# Altium PCB Hospital Negatoscope Touch PCB v1.PcbDoc
Units mm, origin at the board's own origin, x right, y up, seen from the top; angles counter-clockwise.
Board outline 262.91 x 32.79 mm, 2 copper layers (Top Layer, Bottom Layer); 32 components, 41 nets, 94 pads, 22 vias.
Unrouted connection lines stored in the file: 104.
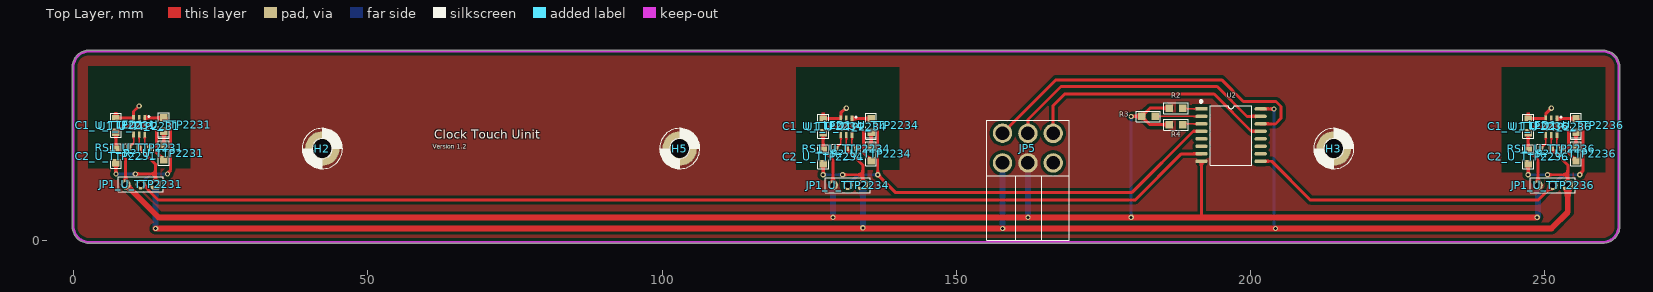
[diagram p0: Top Layer view]
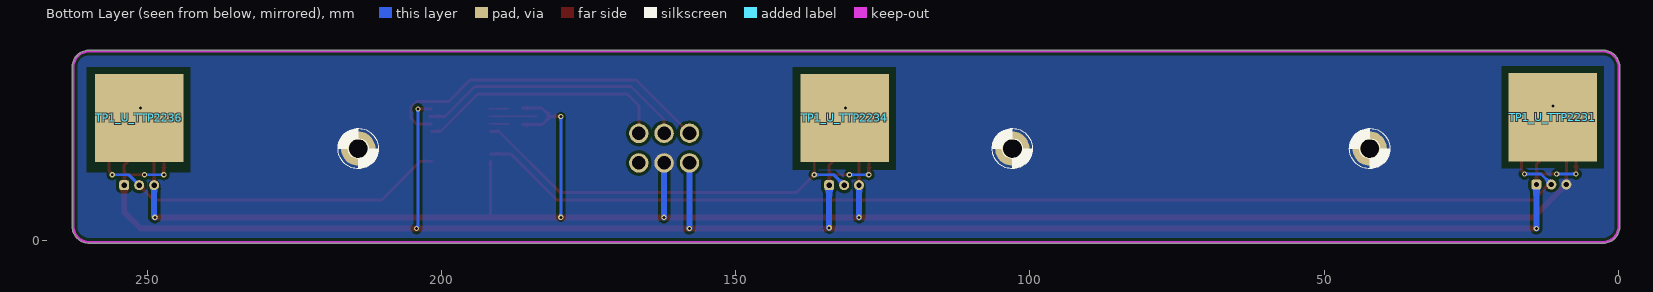
[diagram p1: Bottom Layer view, seen from below]

## Layer stack, top to bottom
Top Solder: solder mask 0.0102, Solder Resist, Dk 3.5
Top Layer: signal copper 0.0356
Dielectric 1: dielectric 0.32, FR-4, Dk 4.8
Bottom Layer: signal copper 0.0356
Bottom Solder: solder mask 0.0102, Solder Resist, Dk 3.5

## Board outline
2.495,-0.449 cw(c2.667,2.413) -0.195,2.241 -0.2,2.286 -0.2,29.591 -0.195,29.636 cw(c2.667,29.464) 2.664,32.331 2.667,32.331 186.944,32.331 259.969,32.331 260.014,32.326 cw(c259.842,29.464) 262.704,29.636 262.709,29.591 262.709,2.159 262.689,2.071 cw(c259.842,2.413) 259.842,-0.454 259.841,-0.454 2.67,-0.454

## Design rules (kind name [scope] priority, off if disabled: settings)
Clearance Clearance_2 [InNamedPolygon('GND_L01_P002') Or InNamedPolygon('GND_L02_P003')] p1: gap=0.5 ignorepadtopadclearanceinfootprint=FALSE
Clearance [All] p2: gap=0.254 ignorepadtopadclearanceinfootprint=FALSE
ComponentClearance [All] p1: gap=0 collisioncheckmode=3 verticalgap=0 showdistances=FALSE
HoleSize [All] p1: absolutevalues=TRUE maxlimit=5 minlimit=0.025 maxpercent=80.000 minpercent=20.000
PlaneConnect [All] p1: planeconnectstyle=Direct reliefexpansion=0.508 reliefentries=4 reliefconductorwidth=0.254 reliefairgap=0.254
PolygonConnect PolygonConnect_2 [All vs IsNamedPolygon('GND_L01_P002') Or IsNamedPolygon('GND_L02_P003')] p1: connectstyle=Direct reliefconductorwidth=0.254 reliefentries=4 polygonreliefangle="90 Angle" airgapwidth=0.254
RoomDefinition U_TTP2234 [InComponentClass('U_TTP2234')] p1 off: confinementstyle=ConfineIn formatcopy=TRUE lockcomponents=FALSE outline 125.857,11.938 137.16,11.938 137.16,27.051 125.857,27.051
RoutingVias [All] p1: holewidth=0.5 width=0.9 viastyle="Through Hole" minholewidth=0.5 minwidth=0.9 maxholewidth=0.5 maxwidth=0.9
SolderMaskExpansion [All] p1: expansion=0.102 istentingtop=FALSE
Width [All] p1: maxlimit=1 minlimit=0.254 preferedwidth=0.5
27 further rules are at their usual default settings.

## Classes and differential pairs
channel class TTP223: U_TTP2231 U_TTP2232 U_TTP2233 U_TTP2234 U_TTP2235 U_TTP2236
component class U_TTP2236: C1_U_TTP2236 C2_U_TTP2236 JP1_U_TTP2236 LED1_U_TTP2236 R?_U_TTP2236 RS1_U_TTP2236 TP1_U_TTP2236 U1_U_TTP2236
component class U_TTP2234: C1_U_TTP2234 C2_U_TTP2234 JP1_U_TTP2234 LED1_U_TTP2234 R?_U_TTP2234 RS1_U_TTP2234 TP1_U_TTP2234 U1_U_TTP2234
component class U_TTP2231: C1_U_TTP2231 C2_U_TTP2231 JP1_U_TTP2231 LED1_U_TTP2231 R?_U_TTP2231 RS1_U_TTP2231 TP1_U_TTP2231 U1_U_TTP2231
component class U_PCF8574: R2 R3 R4 U2
component class Main: H2 H3 H5

## Components (designator, comment, footprint, x,y, rotation, side; value= is the part's Value field where it differs from the comment)
C1_U_TTP2231 "100nF" "C 0805" 7.233,19.558 r270 top (schematic designator C1)
C1_U_TTP2234 "100nF" "C 0805" 127.381,19.431 r270 top (schematic designator C1)
C1_U_TTP2236 "100nF" "C 0805" 247.142,19.431 r270 top (schematic designator C1)
C2_U_TTP2231 "30pF" "C 0805" 7.233,14.351 r90 top (schematic designator C2)
C2_U_TTP2234 "30pF" "C 0805" 127.381,14.224 r90 top (schematic designator C2)
C2_U_TTP2236 "30pF" "C 0805" 247.142,14.224 r90 top (schematic designator C2)
H2 "Round Pad" P3.2C 42.291,15.621 r0 top
H3 "Round Pad" P3.2C 214.122,15.621 r0 top
H5 "Round Pad" P3.2C 102.997,15.621 r0 top
JP1_U_TTP2231 "HDR-1X3" HDR-1X3_M 13.964,9.525 r180 top (schematic designator JP1)
JP1_U_TTP2234 "HDR-1X3" HDR-1X3_M 134.112,9.398 r180 top (schematic designator JP1)
JP1_U_TTP2236 "HDR-1X3" HDR-1X3_M 253.873,9.398 r180 top (schematic designator JP1)
JP5 "Header3X2" ATX-3*2-Right 155.139,-0.012 r0 top
LED1_U_TTP2231 "LED-SMD" "LED 0805G" 15.361,19.685 r270 top (schematic designator LED1)
LED1_U_TTP2234 "LED-SMD" "LED 0805G" 135.509,19.558 r270 top (schematic designator LED1)
LED1_U_TTP2236 "LED-SMD" "LED 0805G" 255.27,19.558 r270 top (schematic designator LED1)
R2 "10K" "R 0805" 187.325,22.479 r0 top
R3 "10K" "R 0805" 182.626,21.082 r0 top
R4 "10K" "R 0805" 187.325,19.685 r0 top
R?_U_TTP2231 "Value" "R 0805" 15.361,14.859 r270 top (schematic designator R?)
R?_U_TTP2234 "Value" "R 0805" 135.509,14.732 r270 top (schematic designator R?)
R?_U_TTP2236 "Value" "R 0805" 255.27,14.732 r270 top (schematic designator R?)
RS1_U_TTP2231 "Resistor Selector" "RS 0603" 12.033,15.748 r180 top (schematic designator RS1)
RS1_U_TTP2234 "Resistor Selector" "RS 0603" 132.182,15.621 r180 top (schematic designator RS1)
RS1_U_TTP2236 "Resistor Selector" "RS 0603" 251.943,15.621 r180 top (schematic designator RS1)
TP1_U_TTP2231 "TouchKey" "Square TouchKey (1.5cm)" 11.176,20.955 r90 top (schematic designator TP1)
TP1_U_TTP2234 "TouchKey" "Square TouchKey (1.5cm)" 131.445,20.828 r90 top (schematic designator TP1)
TP1_U_TTP2236 "TouchKey" "Square TouchKey (1.5cm)" 251.333,20.828 r90 top (schematic designator TP1)
U1_U_TTP2231 "TTP223" SOT23-6L 11.17,19.431 r180 top (schematic designator U1)
U1_U_TTP2234 "TTP223" SOT23-6L 131.318,19.304 r180 top (schematic designator U1)
U1_U_TTP2236 "TTP223" SOT23-6L 251.079,19.304 r180 top (schematic designator U1)
U2 "PCF8574" SOP16W_M 196.668,17.907 r0 top

## Footprints (in the part's own frame and the unit in brackets; to place one, negate y for a bottom-side part, rotate by r counter-clockwise, add the part's x,y. Pads: shape width x height; smd on the part's side, far side on the other; paste and mask are expansions set on the pad)
ATX-3*2-Right [mm]
  round 3.3 hole 2.3: 1(2.705,18.245) 2(7.015,18.23) 3(11.315,18.215) 4(2.705,13.195) 5(7.015,13.195) 6(11.315,13.195)
  silkscreen extent -0.01,0.08 14.03,20.41
"C 0805" [mil] "ï¿½Þ¼ï¿½ï¿½ï¿½ï¿½ï¿½Æ¬ï¿½ï¿½ï¿½ï¿½"
  rect 50x50 smd: 1(-45,0) 2(45,0)
  silkscreen extent -81,-36 81,36, body extent -39,-24 39,24, height 20
HDR-1X3_M [mm] "ï¿½ï¿½Ä¸ï¿½ï¿½3ï¿½ï¿½"
  rrect50% 1.7x1.7 hole 0.9: 1(0,0)
  round 1.7 hole 0.9: 2(2.54,0) 3(5.08,0)
  silkscreen extent -1.27,-1.27 6.35,1.27, body extent -1.27,-1.27 6.35,1.27, height 8.5
"LED 0805G" [mil] "ï¿½ï¿½É«0805LED"
  rect 50x50 smd: 1(-45,0) 2(45,0)
  silkscreen extent -81,-36 92,36, body extent -39,-25 39,25, height 32
P3.2C [mil] "MOUNTING PAD 3.2 mm, round, 5.8 mm Diameter"
  round 230 hole 125.98: P(0,0)
  silkscreen extent -135,-135 135,135
"R 0805" [mm] "1/8Wï¿½ï¿½Æ¬ï¿½ï¿½ï¿½ï¿½"
  rect 1.27x1.27 smd: 1(-1.143,0) 2(1.143,0)
  silkscreen extent -2.05,-0.91 2.05,0.91, body extent -1,-0.62 1,0.63, height 0.5
"RS 0603" [mil]
  rect 35x35 smd: 1(-35,0) 2(104,0) 3(34,0)
  silkscreen extent -63,-28 132,28, body extent -31,-16 32,16, height 16
SOP16W_M [mm] "10.3*10.3*2.6mm£¨³¤¿í¸ß£©"
  rect 2.1x0.6 smd: 1(-5.025,4.445)
  oval 2.1x0.6 smd: 2(-5.025,3.175) 3(-5.025,1.905) 4(-5.025,0.635) 5(-5.025,-0.635) 6(-5.025,-1.905) 7(-5.025,-3.175) 8(-5.025,-4.445) 9(5.025,-4.445) 10(5.025,-3.175) 11(5.025,-1.905) 12(5.025,-0.635) 13(5.025,0.635) 14(5.025,1.905) 15(5.025,3.175) 16(5.025,4.445)
  silkscreen extent -5.23,-5.08 3.56,5.87, body extent -5.15,-5.15 5.15,5.15, height 2.7
SOT23-6L [mm] "3x1.6x1.1mm(ï¿½ï¿½ï¿½ï¿½ï¿½)"
  rect 0.45x1 smd: 1(-0.95,-1.397) 2(0,-1.397) 3(0.95,-1.397) 4(0.95,1.397) 5(0,1.397) 6(-0.95,1.397)
  silkscreen extent -1.78,-1.78 1.55,0.51, body extent -1.5,-1.4 1.5,1.4, height 1.15
"Square TouchKey (1.5cm)" [mm]
  rect 15x15 smd far side: 1(0,0)

## Part data
C1_U_TTP2231 C1_U_TTP2234 C1_U_TTP2236 C2_U_TTP2231 C2_U_TTP2234 C2_U_TTP2236: library part C, "Non-polar patch capacitor", BOM名称=无极性贴片电容, 学习资源=www.ooocke.com, 版权归属=源创客
H2 H3 H5: library part MOUNT-PAD-ROUND, "MOUNTING PAD, round"
JP1_U_TTP2231 JP1_U_TTP2234 JP1_U_TTP2236: library part "Header 3", "3P Connector", BOM名称=3P接插件, 学习资源=www.ooocke.com, 版权归属=源创客
JP5: library part "Header 3X2", "3*2P Connector", BOM名称=3*2P接插件, 学习资源=www.ooocke.com, 版权归属=源创客
LED1_U_TTP2231 LED1_U_TTP2234 LED1_U_TTP2236: "Patch LED", BOM名称=贴片LED, 学习资源=www.ooocke.com, 版权归属=源创客
R2 R3 R4 R?_U_TTP2231 R?_U_TTP2234 R?_U_TTP2236: library part R, "Chip resistor", BOM名称="Chip resistor", 学习资源=www.ooocke.com, 版权归属=源创客
U2: "Remote 8-Bit I/O Expander for I  2C Bus"

## Via types
v1: diameter 0.9, hole 0.5, Top Layer to Bottom Layer, tented both sides, 22 vias

## Nets (pads, with @x,y where several pads share a name; then routed paths per layer and width w, separated by ;. In a path a pad name is that pad's centre, name@x,y a point inside that pad or via, vN(x,y) a via of type N, cw(c..) or ccw(c..) an arc to the next point about the centre after c; other vN are vias at no path point)
3.3V: C2_U_TTP2231.1 C2_U_TTP2234.1 C2_U_TTP2236.1 JP1_U_TTP2231.1 JP1_U_TTP2234.1 JP1_U_TTP2236.1 JP5.4 RS1_U_TTP2231.3 RS1_U_TTP2234.3 RS1_U_TTP2236.3 U1_U_TTP2231.5 U1_U_TTP2234.5 U1_U_TTP2236.5 U2.16 | length 349.5
  Top Layer w0.254: RS1_U_TTP2231.3 U1_U_TTP2231.5 ; RS1_U_TTP2234.3 U1_U_TTP2234.5 ; RS1_U_TTP2236.3 U1_U_TTP2236.5
  Top Layer w0.5: v1(7.233,11.303) C2_U_TTP2231.1 ; v1(10.535,11.303) 13.964,11.303 ; RS1_U_TTP2231.3 13.964,12.954 13.964,11.303 ; JP1_U_TTP2231.1 13.964,11.303 ; v1(127.381,11.176) C2_U_TTP2234.1 ; v1(130.683,11.176) 134.112,11.176 ; RS1_U_TTP2234.3 134.112,12.827 134.112,11.176 ; JP1_U_TTP2234.1 134.112,11.176 ; U2.16 v1(203.962,22.352) ; v1(247.142,11.176) C2_U_TTP2236.1 ; v1(250.444,11.176) 253.873,11.176 ; RS1_U_TTP2236.3 253.873,12.827 253.873,11.176 ; JP1_U_TTP2236.1 253.873,11.176
  Top Layer w1: v1(13.97,2.032) 133.985,2.032 v1(134.112,2.159) 134.239,2.032 v1(157.861,2.032) v1(204.216,2.032) 251.079,2.032 253.873,4.826 JP1_U_TTP2236.1@253.873,9.704
  Bottom Layer w0.5: v1(7.233,11.303) v1(10.535,11.303) ; v1(127.381,11.176) v1(130.683,11.176) ; v1(203.962,22.352) 203.962,2.394 204.216,2.14 v1(204.216,2.032) ; v1(247.142,11.176) v1(250.444,11.176)
  Bottom Layer w1: JP1_U_TTP2231.1 13.964,2.038 v1(13.97,2.032) ; v1(134.112,2.159) JP1_U_TTP2234.1 ; JP5.4 157.844,2.049 v1(157.861,2.032)
AHLB_U_TTP2231: RS1_U_TTP2231.2 U1_U_TTP2231.4 | length 2.6
  Top Layer w0.254: RS1_U_TTP2231.2 10.22,16.576 U1_U_TTP2231.4
AHLB_U_TTP2232: 
AHLB_U_TTP2233: 
AHLB_U_TTP2234: RS1_U_TTP2234.2 U1_U_TTP2234.4 | length 2.6
  Top Layer w0.254: RS1_U_TTP2234.2 130.368,16.449 U1_U_TTP2234.4
AHLB_U_TTP2235: 
AHLB_U_TTP2236: RS1_U_TTP2236.2 U1_U_TTP2236.4 | length 2.6
  Top Layer w0.254: RS1_U_TTP2236.2 250.129,16.449 U1_U_TTP2236.4
GND: C1_U_TTP2231.2 C1_U_TTP2234.2 C1_U_TTP2236.2 C2_U_TTP2231.2 C2_U_TTP2234.2 C2_U_TTP2236.2 H2.P H3.P H5.P JP1_U_TTP2231.3 JP1_U_TTP2234.3 JP1_U_TTP2236.3 JP5.5 R2.1 R3.1 R4.1 R?_U_TTP2231.2 R?_U_TTP2234.2 R?_U_TTP2236.2 U1_U_TTP2231.2 U1_U_TTP2234.2 U1_U_TTP2236.2 U2.8 | length 373.3
  Top Layer w0.254: 11.17,19.431 U1_U_TTP2231.2 ; 131.318,19.304 U1_U_TTP2234.2 ; 251.079,19.304 U1_U_TTP2236.2
  Top Layer w0.5: JP1_U_TTP2231.3 8.884,13.843 C2_U_TTP2231.2 7.233,18.542 8.122,19.431 11.17,19.431 13.329,19.431 14.091,18.669 14.091,14.986 R?_U_TTP2231.2 ; JP1_U_TTP2234.3 129.032,13.716 C2_U_TTP2234.2 127.381,18.415 128.27,19.304 131.318,19.304 133.477,19.304 134.239,18.542 134.239,14.859 R?_U_TTP2234.2 ; v1(179.705,21.082) R3.1 ; R4.1 182.88,19.685 R3.1 ; R2.1 182.88,22.479 R3.1 ; 191.643,4.318 U2.8 ; JP1_U_TTP2236.3 248.793,13.716 C2_U_TTP2236.2 247.142,18.415 248.031,19.304 251.079,19.304 253.238,19.304 254,18.542 254,14.859 R?_U_TTP2236.2
  Top Layer w1: JP1_U_TTP2231.3 14.472,3.937 v1(129.032,3.937) v1(162.179,3.937) v1(179.705,3.937) 191.643,3.937 v1(248.666,3.937)
  Bottom Layer w0.5: v1(179.705,3.937) v1(179.705,21.082)
  Bottom Layer w1: v1(129.032,3.937) JP1_U_TTP2234.3 ; JP5.5 162.154,3.962 v1(162.179,3.937) ; v1(248.666,3.937) 248.793,4.064 JP1_U_TTP2236.3
INPUT_U_TTP2231: C1_U_TTP2231.1 TP1_U_TTP2231.1 U1_U_TTP2231.3 | length 5.5
  Top Layer w0.5: C1_U_TTP2231.1 7.36,20.828 U1_U_TTP2231.3 10.22,21.904 v1(11.176,22.86)
INPUT_U_TTP2232: 
INPUT_U_TTP2233: 
INPUT_U_TTP2234: C1_U_TTP2234.1 TP1_U_TTP2234.1 U1_U_TTP2234.3 | length 5.4
  Top Layer w0.254: C1_U_TTP2234.1 C1_U_TTP2234.1@127.381,20.701
  Top Layer w0.5: C1_U_TTP2234.1@127.381,20.701 U1_U_TTP2234.3 130.368,21.704 131.066,22.402 131.241,22.402 v1(131.318,22.479)
INPUT_U_TTP2235: 
INPUT_U_TTP2236: C1_U_TTP2236.1 TP1_U_TTP2236.1 U1_U_TTP2236.3 | length 5.3
  Top Layer w0.254: C1_U_TTP2236.1 C1_U_TTP2236.1@247.142,20.701
  Top Layer w0.5: C1_U_TTP2236.1@247.142,20.701 U1_U_TTP2236.3 250.129,21.529 v1(251.079,22.479)
INT: JP5.3 U2.13 | length 43.4
  Top Layer w0.5: JP5.3 166.454,22.944 168.402,24.892 193.802,24.892 200.152,18.542 U2.13
NetLED1_U_TTP2231_2: LED1_U_TTP2231.2 R?_U_TTP2231.1 | length 2.5
  Top Layer w0.5: R?_U_TTP2231.1 LED1_U_TTP2231.2
NetLED1_U_TTP2232_2: 
NetLED1_U_TTP2233_2: 
NetLED1_U_TTP2234_2: LED1_U_TTP2234.2 R?_U_TTP2234.1 | length 2.5
  Top Layer w0.5: R?_U_TTP2234.1 LED1_U_TTP2234.2
NetLED1_U_TTP2235_2: 
NetLED1_U_TTP2236_2: LED1_U_TTP2236.2 R?_U_TTP2236.1 | length 2.5
  Top Layer w0.5: R?_U_TTP2236.1 LED1_U_TTP2236.2
NetR2_2: R2.2 U2.1 | length 3.5
  Top Layer w0.254: R2.2 188.595,22.352 U2.1@191.952,22.352
NetR3_2: R3.2 U2.2 | length 8.2
  Top Layer w0.254: R3.2 U2.2@191.952,21.082
NetR4_2: R4.2 U2.3 | length 3.5
  Top Layer w0.254: R4.2 188.595,19.812 U2.3@191.952,19.812
NetU2_11: U2.11
NetU2_12: U2.12
OUTPUT_U_TTP2231: JP1_U_TTP2231.2 LED1_U_TTP2231.1 U1_U_TTP2231.1 U2.7 | length 203.4
  Top Layer w0.5: JP1_U_TTP2231.2 11.653,9.295 12.177,9.295 12.61,8.862 12.61,8.715 14.467,6.858 180.34,6.858 188.214,14.732 U2.7 ; U1_U_TTP2231.1 LED1_U_TTP2231.1 16.523,19.666 16.523,11.951 15.996,11.424 v1(15.996,11.303)
  Bottom Layer w0.5: JP1_U_TTP2231.2 13.202,11.303 v1(15.996,11.303)
OUTPUT_U_TTP2232: U2.6
OUTPUT_U_TTP2233: U2.5
OUTPUT_U_TTP2234: JP1_U_TTP2234.2 LED1_U_TTP2234.1 U1_U_TTP2234.1 U2.4 | length 79.6
  Top Layer w0.5: U1_U_TTP2234.1 LED1_U_TTP2234.1 136.652,19.558 v1(136.652,11.176) 139.7,8.128 179.793,8.128 190.203,18.538 191.639,18.538 U2.4
  Bottom Layer w0.5: JP1_U_TTP2234.2 133.35,11.176 v1(136.652,11.176)
OUTPUT_U_TTP2235: U2.10
OUTPUT_U_TTP2236: JP1_U_TTP2236.2 LED1_U_TTP2236.1 U1_U_TTP2236.1 U2.9 | length 72.2
  Top Layer w0.5: U2.9@201.676,13.462 203.581,13.462 210.185,6.858 248.793,6.858 JP1_U_TTP2236.2 ; U1_U_TTP2236.1 LED1_U_TTP2236.1 256.432,19.539 256.432,11.824 255.905,11.297 v1(255.905,11.176)
  Bottom Layer w0.5: JP1_U_TTP2236.2 253.111,11.176 v1(255.905,11.176)
SCL: JP5.1 U2.14 | length 58.8
  Top Layer w0.5: JP5.1 166.916,27.305 195.072,27.305 198.755,23.622 204.295,23.622 205.17,22.747 205.17,20.766 204.216,19.812 U2.14
SDA: JP5.2 U2.15 | length 46.6
  Top Layer w0.5: JP5.2 162.154,20.549 167.767,26.162 194.31,26.162 199.39,21.082 U2.15@202.002,21.082
SHIELD: 
TOG_U_TTP2231: RS1_U_TTP2231.1 U1_U_TTP2231.6 | length 2.6
  Top Layer w0.254: U1_U_TTP2231.6 12.12,16.551 RS1_U_TTP2231.1
TOG_U_TTP2232: 
TOG_U_TTP2233: 
TOG_U_TTP2234: RS1_U_TTP2234.1 U1_U_TTP2234.6 | length 2.6
  Top Layer w0.254: U1_U_TTP2234.6 132.268,16.424 RS1_U_TTP2234.1
TOG_U_TTP2235: 
TOG_U_TTP2236: RS1_U_TTP2236.1 U1_U_TTP2236.6 | length 2.6
  Top Layer w0.254: U1_U_TTP2236.6 252.029,16.424 RS1_U_TTP2236.1
pads on no net: JP5.6

## Polygon pours and split planes (outlines as drawn)
GND on Bottom Layer "GND_L02_P003" (solid, pour order 3): 2.495,-0.449 cw(c2.667,2.413) -0.195,2.241 -0.2,2.286 -0.2,29.591 -0.195,29.636 cw(c2.667,29.464) 2.664,32.331 2.667,32.331 186.944,32.331 259.969,32.331 260.014,32.326 cw(c259.842,29.464) 262.704,29.636 262.709,29.591 262.709,2.159 262.689,2.071 cw(c259.842,2.413) 259.842,-0.454 259.841,-0.454 2.67,-0.454
GND on Top Layer "GND_L01_P002" (solid, pour order 2): 2.495,-0.449 cw(c2.667,2.413) -0.195,2.241 -0.2,2.286 -0.2,29.591 -0.195,29.636 cw(c2.667,29.464) 2.664,32.331 2.667,32.331 186.944,32.331 259.969,32.331 260.014,32.326 cw(c259.842,29.464) 262.704,29.636 262.709,29.591 262.709,2.159 262.689,2.071 cw(c259.842,2.413) 259.842,-0.454 259.841,-0.454 2.67,-0.454

## Keep-outs
Keep-Out Layer:
  lines w0.4: 0,2.286 0,29.591 ; 0,2.413 ccw(c2.667,2.413) 2.667,-0.254 ; 0,29.464 cw(c2.667,29.464) 2.667,32.131 186.944,32.131 259.969,32.131 ; 2.54,-0.254 259.842,-0.254 ccw(c259.842,2.413) 262.509,2.413 ; 259.842,32.131 cw(c259.842,29.464) 262.509,29.464 ; 262.509,2.159 262.509,29.591

## Other copper
Top Layer:
  pour cut-out: 19.812,29.636 2.54,29.636 2.54,12.319 19.812,12.319
  pour cut-out: 140.335,29.463 122.809,29.463 122.809,12.065 140.335,12.065
  pour cut-out: 260.223,29.463 242.697,29.463 242.697,11.557 260.223,11.557
Bottom Layer:
  pour cut-out: 19.812,29.636 2.54,29.636 2.54,12.319 19.812,12.319
  pour cut-out: 140.335,29.463 122.809,29.463 122.809,12.065 140.335,12.065
  pour cut-out: 260.223,29.463 242.697,29.463 242.697,11.557 260.223,11.557

## Silkscreen, mask and mechanical layers (free items; w line width, h text height)
Top Overlay:
  text "Clock Touch Uinit" at 61.337,16.769 h2.5
  text "Version 1.2" at 61.083,15.376 h1.3
Mechanical 1:
  lines w0.254: 7.614,10.795 15.234,10.795 15.234,8.255 ; 127.762,11.049 135.382,11.049 135.382,8.509
Mechanical 15:
  region: 221.492,18.626 221.492,18.65 221.516,18.65 221.516,18.626
  region: 221.587,18.65 221.587,18.626 221.563,18.626 221.563,18.65
  region: 221.095,21.293 221.071,21.293 221.071,21.317 221.095,21.317